# EAGLE board Stripline (EAGLE 9.6.2)

Size 450 x 100 mm. Coordinates in mm from the lower left corner, seen from the top.
Outline: 0,0 0,100 450,100 450,0 0,0
Copper layers (1*16): Top 0.035mm / dielectric 1.5mm / Bottom 0.035mm
Design rules "default *": minimum track width 6mil, minimum drill 0.35mm, track to track 6mil, track to pad 6mil, pad to pad 6mil, via to via 6mil, smd to smd 6mil, copper to edge 0mil, drill to drill 6mil, minimum pad ring 10mil, minimum via ring 8mil, stop-mask expansion 4mil, vias tented up to drill 0mil, thermal gap 10mil
Holes 0.5 mm at 2.5,97.5 2.5,95 2.5,92.5 2.5,90 2.5,87.5 2.5,85 2.5,82.5 2.5,80 2.5,77.5 2.5,75 2.5,72.5 2.5,70 2.5,67.5 2.5,65 2.5,62.5 2.5,60 2.5,57.5 2.5,55 2.5,52.5 2.5,50 2.5,47.5 2.5,42.5 2.5,45 2.5,40 2.5,37.5 2.5,35 2.5,32.5 2.5,30 2.5,27.5 2.5,25 2.5,22.5 2.5,20 2.5,17.5 2.5,15 2.5,12.5 2.5,10 2.5,7.5 2.5,5 2.5,2.5 447.5,97.5 447.5,95 447.5,92.5 447.5,90 447.5,87.5 447.5,85 447.5,82.5 447.5,80 447.5,77.5 447.5,75 447.5,72.5 447.5,70 447.5,67.5 447.5,65 447.5,62.5 447.5,60 447.5,57.5 447.5,55 447.5,52.5 447.5,50 447.5,47.5 447.5,45 447.5,42.5 447.5,40 447.5,37.5 447.5,35 447.5,32.5 447.5,30 447.5,27.5 447.5,22.5 447.5,25 447.5,20 447.5,17.5 447.5,15 447.5,12.5 447.5,10 447.5,7.5 447.5,5 447.5,2.5
Holes 3.5 mm at 25,50 425,50 225,50

## Placement (x,y rotation side)
E$1  [LOGO_STASIS]  237.5,72.5 270 top
E$2  [LOGO_STASIS]  212.5,75 90 top
E$3  [LOGO_STASIS]  212.5,22.5 90 top
E$11  [LOGO_STASIS]  237.5,20 270 top

## Library data of the parts
E$1-E$3 E$11 = Orzada

## Tracks (layer width: path | path; a pad name or v marks a point on that pad's centre or on a via)
(copper drawn outside any net)
  shapes: Bottom area x5, Top area x2